# Altium PCB 全志-Linux.PcbDoc
Units mil, origin at the board's own origin, x right, y up, seen from the top; angles counter-clockwise.
Board outline 1968.5 x 1377.95 mil, 4 copper layers (Component Side, GND, POWER, Solder Side), stack 33.234 mil thick; 61 components, 52 nets, 328 pads, 234 vias.
Unrouted connection lines stored in the file: 41.
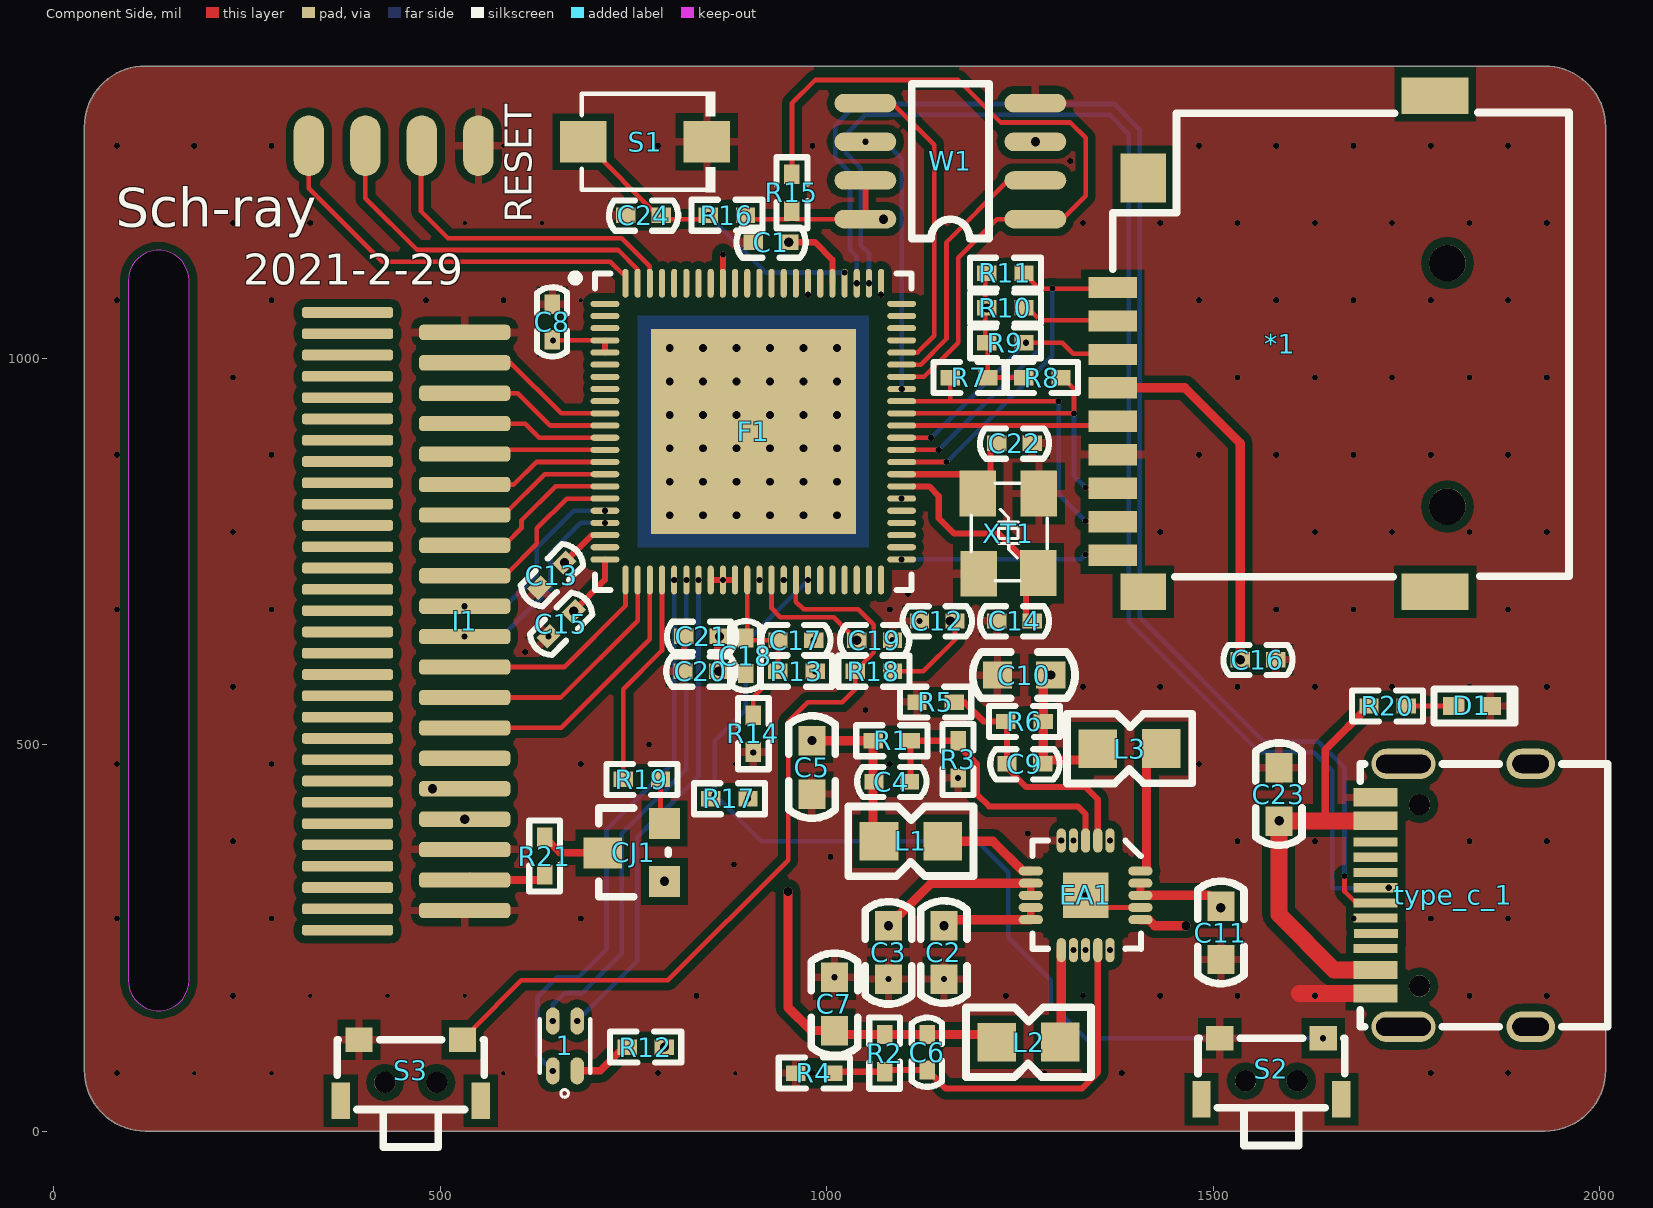
[diagram p0: Component Side view]
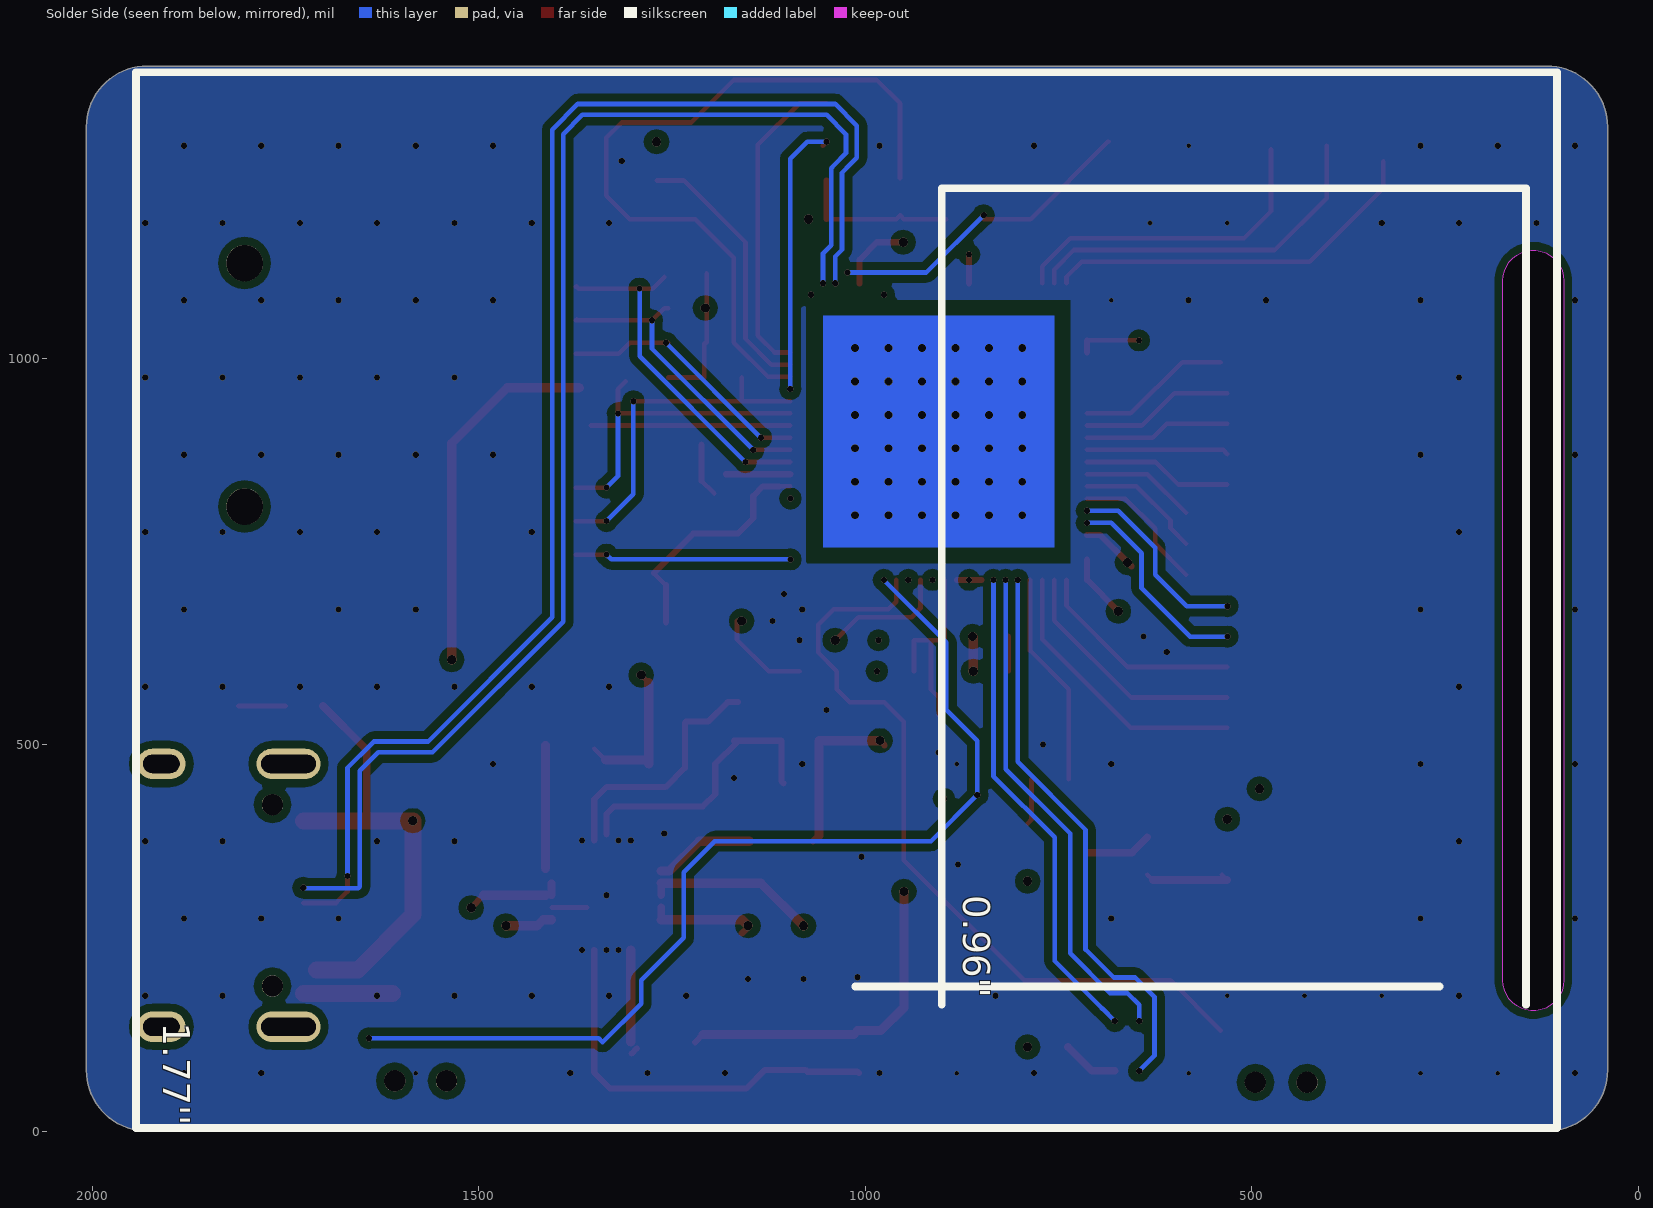
[diagram p1: Solder Side view, seen from below]
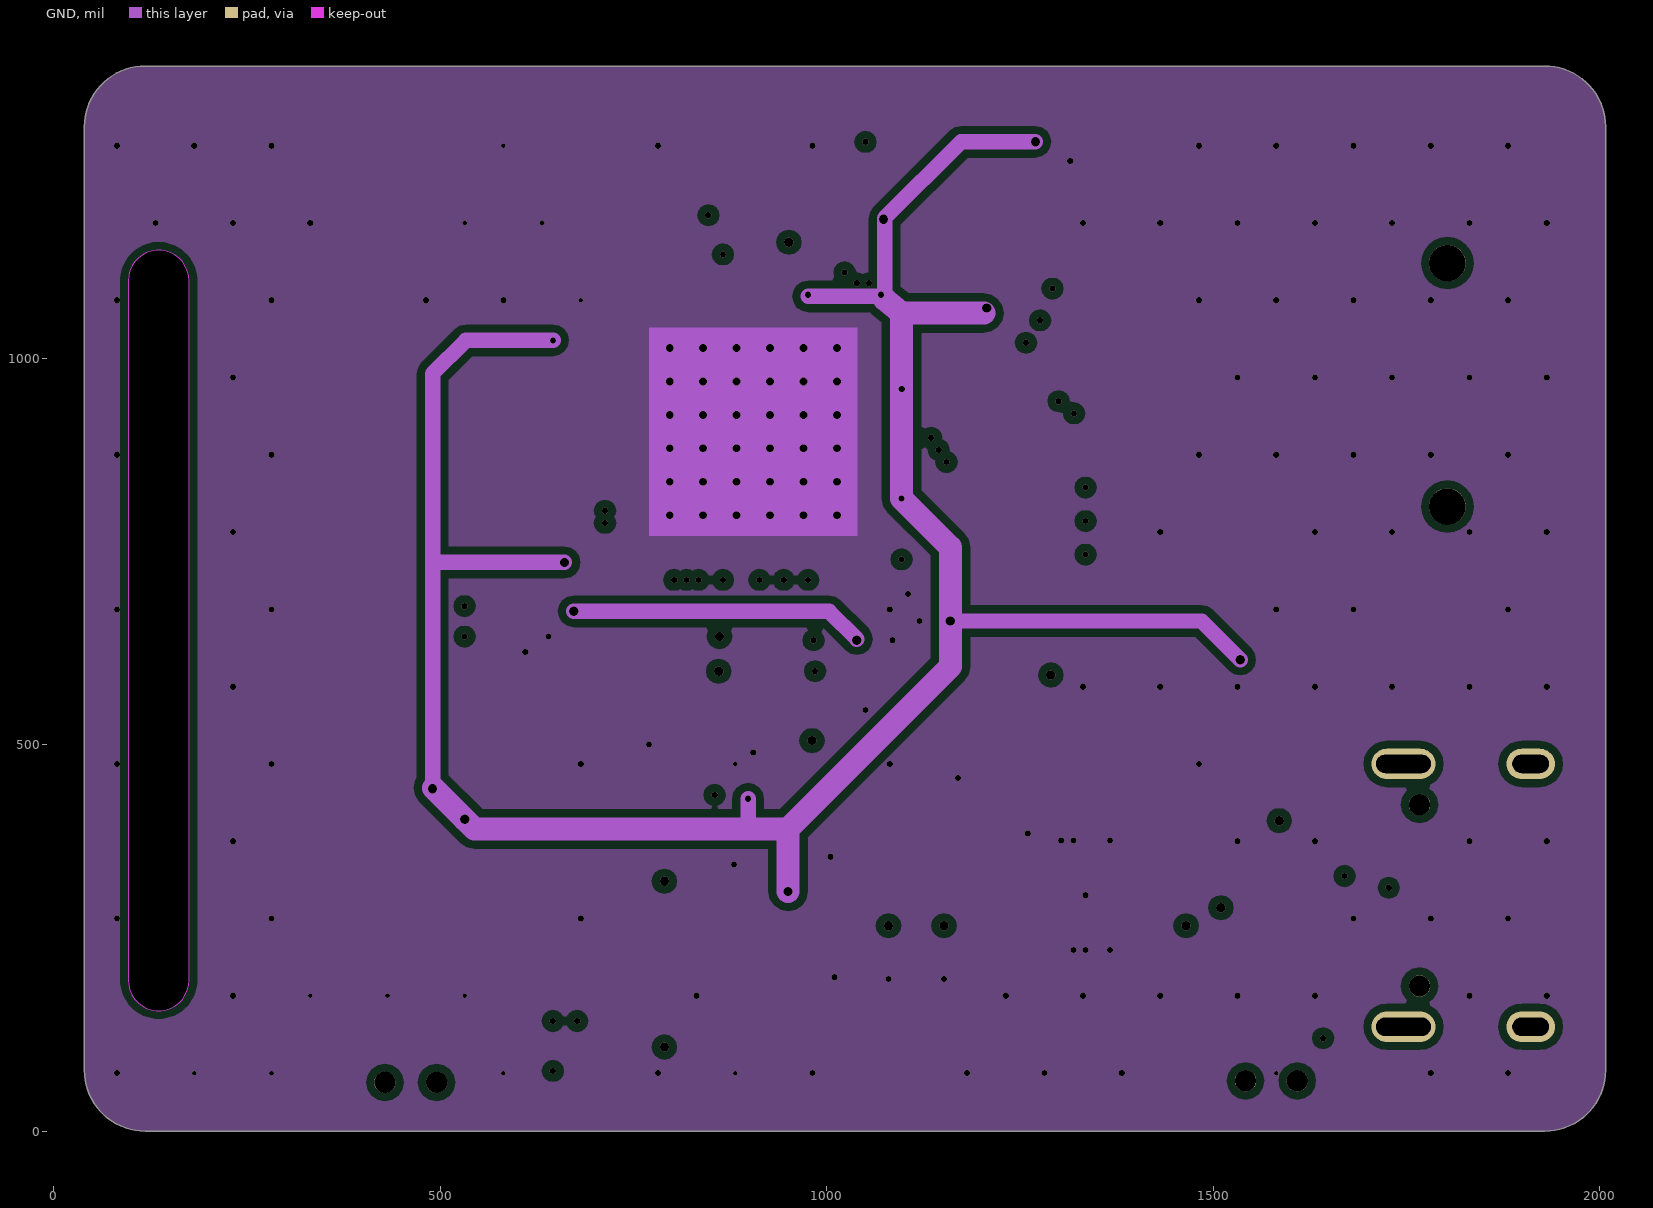
[diagram p2: GND]
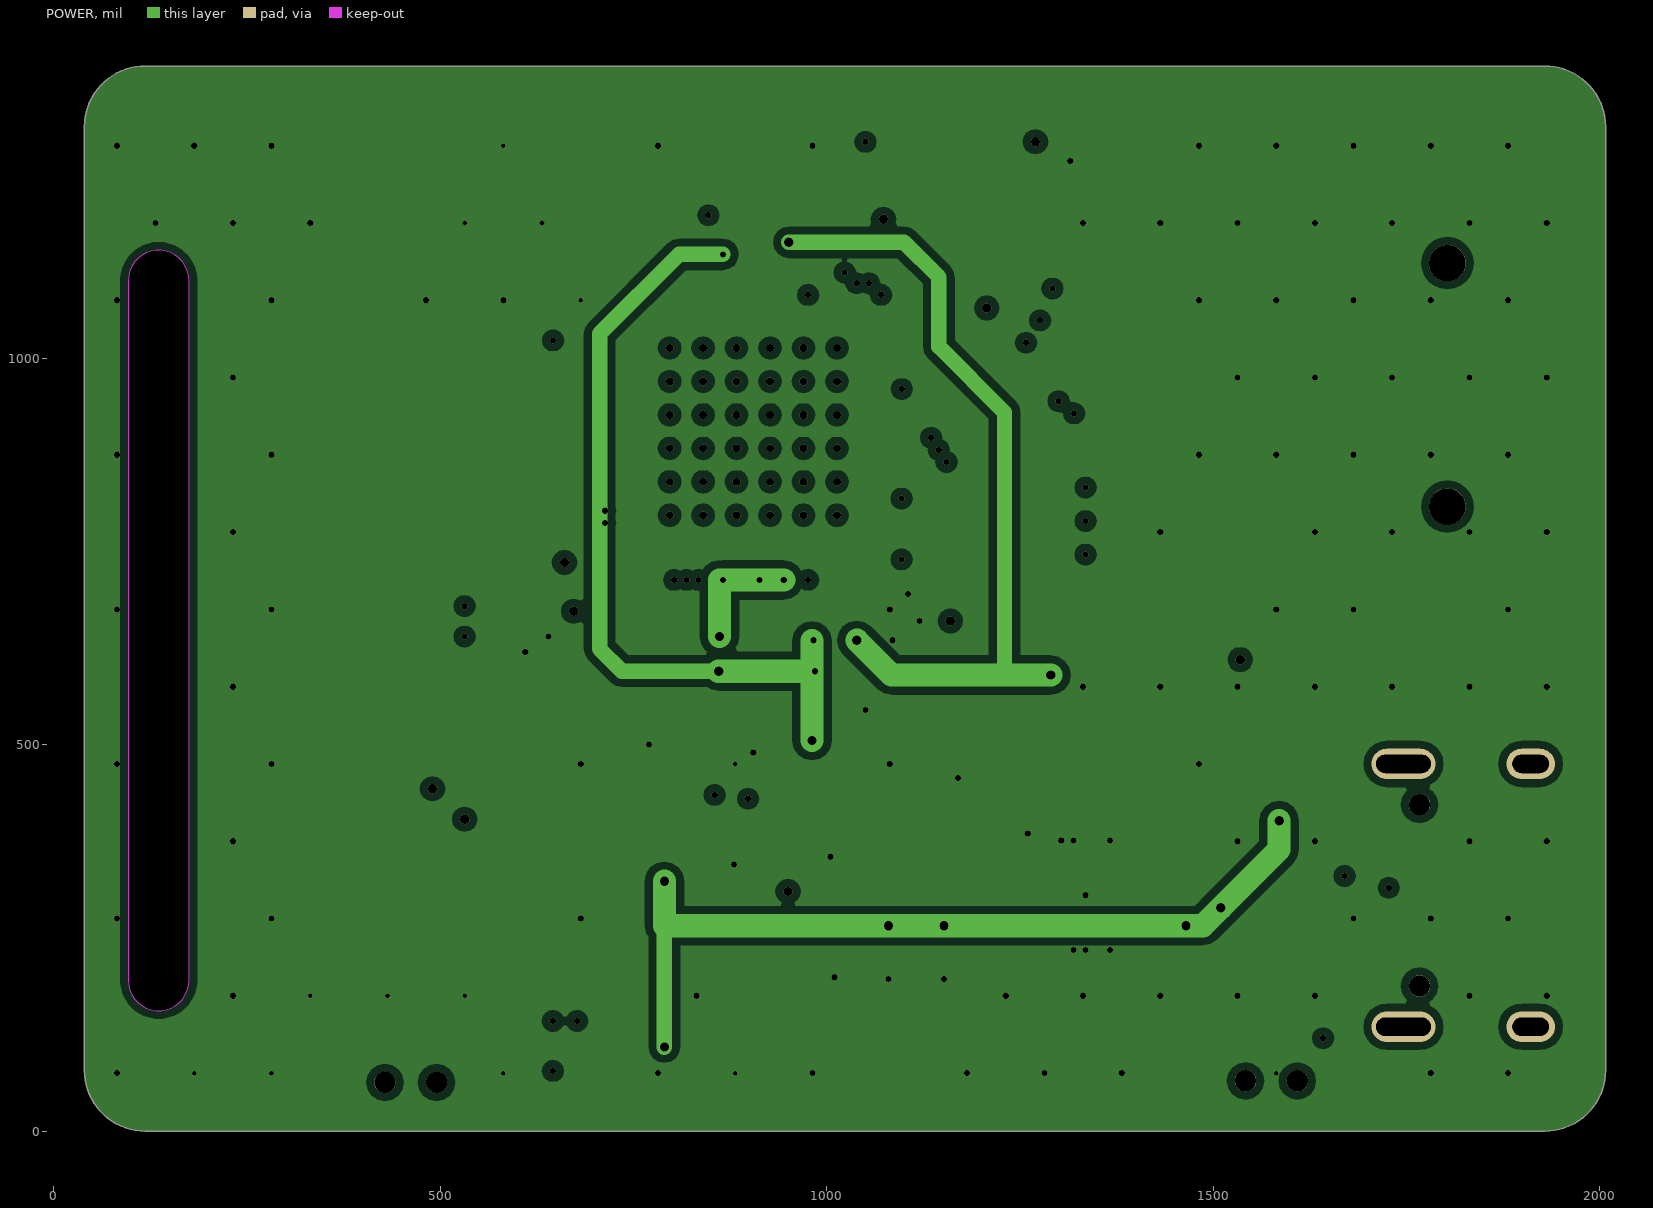
[diagram p3: POWER]
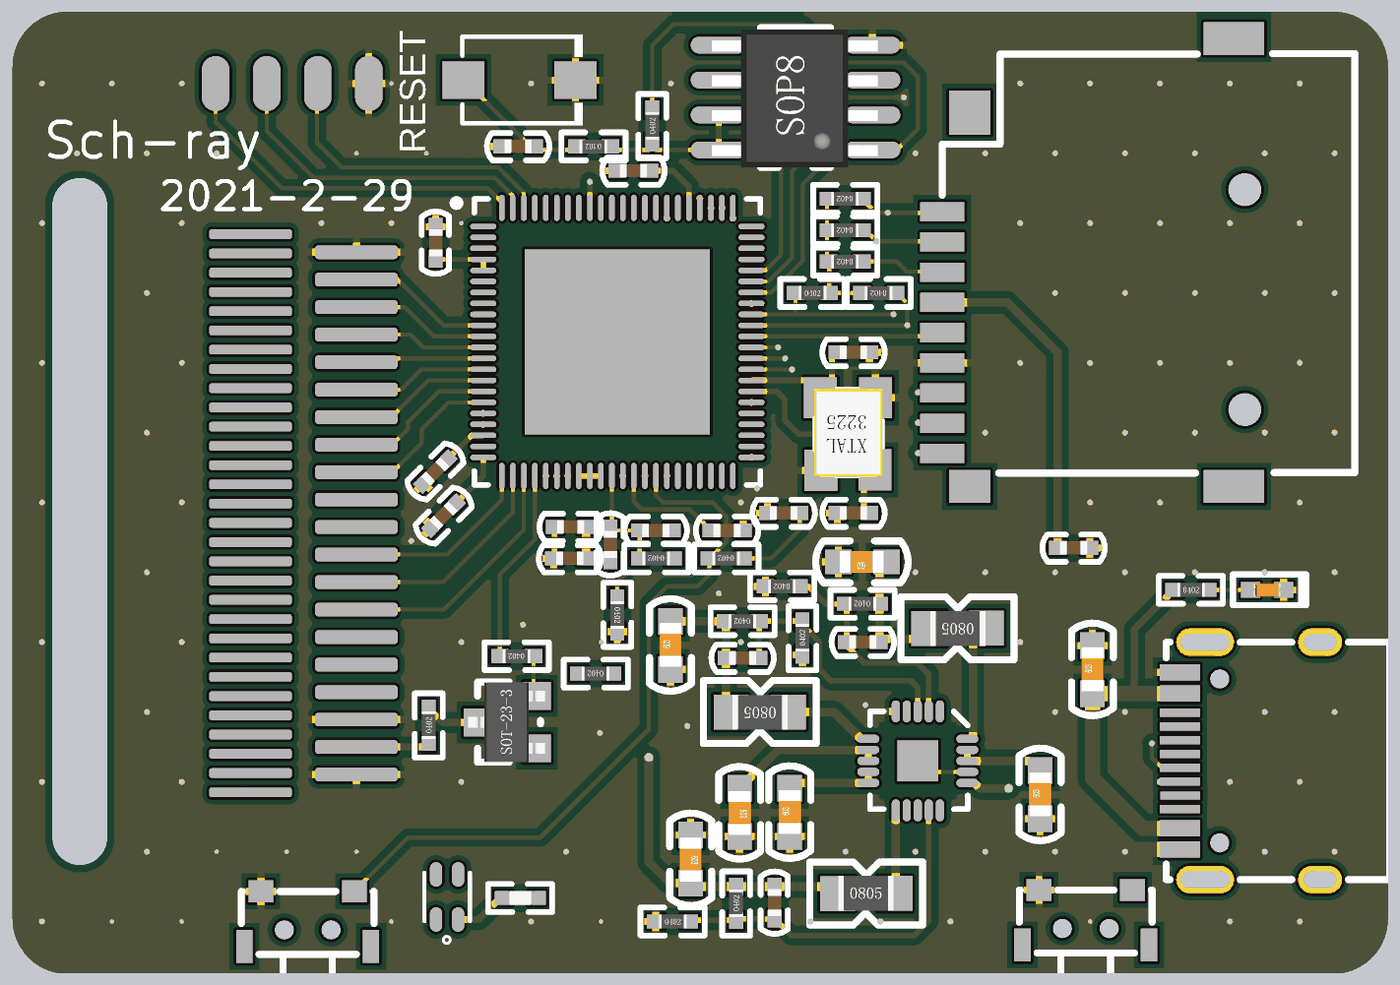
[diagram p4: 3D render of the assembled board from above, using the file's embedded part models]

## Layer stack, top to bottom
Top Solder: solder mask 0.4, Solder Resist, Dk 3.5
Component Side: signal copper 1.4
Dielectric 1: core 12.6, FR-4, Dk 4.8
GND: signal copper 1.417
Dielectric 3: prepreg 5, Dk 4.2
POWER: signal copper 1.417
Dielectric 4: core 10, Dk 4.2
Solder Side: signal copper 1.4
Bottom Solder: solder mask 0.4, Solder Resist, Dk 3.5

## Board outline
39.37,78.74 ccw(c118.11,78.74) 118.11,0 1929.13,0 ccw(c1929.13,78.74) 2007.87,78.74 2007.87,1299.21 ccw(c1929.13,1299.21) 1929.13,1377.95 118.11,1377.95 ccw(c118.11,1299.21) 39.37,1299.21
cut-out: 96.26,195 ccw(c135.63,195) 175,195 175,1100.51 ccw(c135.63,1100.51) 96.26,1100.51

## Design rules (kind name [scope] priority, off if disabled: settings)
Clearance [All] p1: gap=10 ignorepadtopadclearanceinfootprint=FALSE except(0: Arc-Hole Track-Hole SMDPad-Hole THPad-Hole Via-Hole Fill-Hole Poly-Hole Region-Hole Text-Hole)
DiffPairsRouting DiffPair_6milDiffPairsRouting [InDifferentialPair ('差分_1')] p1: maxlimit=16 minlimit=8 mostfreqgap=8 toplayer_minwidth=6 toplayer_maxwidth=6 toplayer_prefwidth=6 midlayer1_minwidth=6 midlayer1_maxwidth=6 midlayer1_prefwidth=6 midlayer2_minwidth=6 midlayer2_maxwidth=6 midlayer2_prefwidth=6 bottomlayer_minwidth=6 bottomlayer_maxwidth=6 bottomlayer_prefwidth=6 maxuncoupledlength=142187.2552mi
DiffPairsRouting DiffPairsRouting_1 [InDifferentialPairClass('usb-2.0')] p2: maxlimit=10 minlimit=10 mostfreqgap=10 toplayer_minwidth=15 toplayer_maxwidth=15 toplayer_prefwidth=15 midlayer1_minwidth=15 midlayer1_maxwidth=15 midlayer1_prefwidth=15 midlayer2_minwidth=15 midlayer2_maxwidth=15 midlayer2_prefwidth=15 bottomlayer_minwidth=15 bottomlayer_maxwidth=15 bottomlayer_prefwidth=15 maxuncoupledlength=500
DiffPairsRouting [All] p3: maxlimit=10 minlimit=10 mostfreqgap=10 toplayer_minwidth=15 toplayer_maxwidth=15 toplayer_prefwidth=15 midlayer1_minwidth=15 midlayer1_maxwidth=15 midlayer1_prefwidth=15 midlayer2_minwidth=15 midlayer2_maxwidth=15 midlayer2_prefwidth=15 bottomlayer_minwidth=15 bottomlayer_maxwidth=15 bottomlayer_prefwidth=15 maxuncoupledlength=500
MatchedLengths DiffPair_6milMatchedLengths [InDifferentialPair ('差分_1')] p1: tolerance=5 checknetsindiffpair=TRUE checkdiffpairvsdiffpair=FALSE checkxsignals=FALSE checkothers=FALS
MatchedLengths [InDifferentialPairClass('usb-2.0')] p2: tolerance=1000 checknetsindiffpair=FALSE checkdiffpairvsdiffpair=TRUE checkxsignals=TRUE checkothers=TRUE
PlaneConnect [All] p1: pad.planeconnectstyle=Relief pad.reliefexpansion=20 pad.reliefentries=4 pad.reliefconductorwidth=10 pad.reliefairgap=10 via.planeconnectstyle=Direct via.reliefexpansion=20 via.reliefentries=4 via.reliefconductorwidth=10 via.reliefairgap=10
PolygonConnect PolygonConnect_4 [All vs IsNamedPolygon('GND-4')] p1: thpad.connectstyle=Relief thpad.reliefconductorwidth=10 thpad.reliefentries=4 thpad.polygonreliefangle="90 Angle" thpad.airgapwidth=10 smdpad.connectstyle=Relief smdpad.reliefconductorwidth=10 smdpad.reliefentries=4 smdpad.polygonreliefangle="90 Angle" smdpad.airgapwidth=10 via.connectstyle=Direct via.reliefconductorwidth=10 via.reliefentries=4 via.polygonreliefangle="90 Angle" via.airgapwidth=10
PolygonConnect PolygonConnect_3 [All vs IsNamedPolygon('GND-3')] p2: thpad.connectstyle=Relief thpad.reliefconductorwidth=10 thpad.reliefentries=4 thpad.polygonreliefangle="90 Angle" thpad.airgapwidth=10 smdpad.connectstyle=Relief smdpad.reliefconductorwidth=10 smdpad.reliefentries=4 smdpad.polygonreliefangle="90 Angle" smdpad.airgapwidth=10 via.connectstyle=Direct via.reliefconductorwidth=10 via.reliefentries=4 via.polygonreliefangle="90 Angle" via.airgapwidth=10
PolygonConnect PolygonConnect_2 [All vs IsNamedPolygon('GND-2')] p3: thpad.connectstyle=Relief thpad.reliefconductorwidth=10 thpad.reliefentries=4 thpad.polygonreliefangle="90 Angle" thpad.airgapwidth=10 smdpad.connectstyle=Relief smdpad.reliefconductorwidth=10 smdpad.reliefentries=4 smdpad.polygonreliefangle="90 Angle" smdpad.airgapwidth=10 via.connectstyle=Direct via.reliefconductorwidth=10 via.reliefentries=4 via.polygonreliefangle="90 Angle" via.airgapwidth=10
PolygonConnect PolygonConnect_1 [All vs IsNamedPolygon('GND-1')] p4: thpad.connectstyle=Relief thpad.reliefconductorwidth=10 thpad.reliefentries=4 thpad.polygonreliefangle="90 Angle" thpad.airgapwidth=10 smdpad.connectstyle=Relief smdpad.reliefconductorwidth=10 smdpad.reliefentries=4 smdpad.polygonreliefangle="90 Angle" smdpad.airgapwidth=10 via.connectstyle=Direct via.reliefconductorwidth=10 via.reliefentries=4 via.polygonreliefangle="90 Angle" via.airgapwidth=10
PolygonConnect [All] p5: connectstyle=Relief reliefconductorwidth=10 reliefentries=4 polygonreliefangle="90 Angle" airgapwidth=10
RoutingVias [All] p1: holewidth=28 width=50 viastyle="Through Hole" minholewidth=28 minwidth=50 maxholewidth=28 maxwidth=50
SolderMaskExpansion [All] p1: expansion=4
Width [All] p1: maxlimit=50 minlimit=4 preferedwidth=30 toplayer_maxwidth=10 toplayer_prefwidth=6 midlayer1_minwidth=10 midlayer2_minwidth=10 bottomlayer_maxwidth=10 bottomlayer_prefwidth=6 minimp=50.000000 maximp=50.000000 favimp=50.000000
28 further rules are at their usual default settings.

## Components (designator, comment, footprint, x,y, rotation, side; value= is the part's Value field where it differs from the comment)
1 "1615RGB" 1615RGB 660.81,118.66 r0 top
*1 "tf卡" tf卡座 1625.55,989.17 r90 top locked
C1 "Cap Semi" C0402 950,1150 r180 top value=0.1uF
C2 "Cap Semi" C0603 1151.63,196.63 r90 top value=10uF
C3 "Cap Semi" C0603 1080,265.63 r270 top value=10uF
C4 "Cap Semi" C0402 1106.2,452.2 r180 top value=220pF
C5 "Cap Semi" C0603 981,436 r90 top value=10uF
C6 "Cap Semi" C0402 1130,80 r90 top value=220pF
C7 "Cap Semi" C0603 1010,199 r270 top value=10uF
C8 "Cap Semi" C0402 645,1025 r90 top value=0.1uF
C9 "Cap Semi" C0402 1278.31,475 r180 top value=20pF
C10 "Cap Semi" C0603 1290,590 r180 top value=10uF
C11 "Cap Semi" C0603 1510,222 r90 top value=10uF
C12 "Cap Semi" C0402 1165.05,660 r180 top value=0.1uF
C13 "Cap Semi" C0402 660,735 r225 top value=0.1uF
C14 "Cap Semi" C0402 1265,660 r180 top value=18pF
C15 "Cap Semi" C0402 671.82,671.82 r225 top value=0.1uF
C16 "Cap Semi" C0402 1580,610 r180 top value=0.1uF
C17 "Cap Semi" C0402 938,635 r0 top value=0.1uF
C18 "Cap Semi" C0402 895,593 r90 top value=0.1uF
C19 "Cap Semi" C0402 1040,635 r0 top value=0.1uF
C20 "Cap Semi" C0402 859.13,595 r180 top value=0.1uF
C21 "Cap Semi" C0402 860.13,640 r180 top value=1uF
C22 "Cap Semi" C0402 1265,890 r180 top value=18pF
C23 "Cap Semi" C0603 1585,401 r90 top value=10uF
C24 "Cap Semi" C0402 785,1185 r180 top value=0.1uF
CJ1 "MOSFET-N" SOT23 790.63,318.12 r90 top
D1 "LED3" "LED0402 R" 1834.88,549.99 r0 top
EA1 "EA3036" QFN20-3mm 1366.5,375.87 r270 top
F1 "F1C100S" QFN88 905,905 r0 top
I1 "Header 20" 20P液晶 531.5,285.43 r0 top locked
L1 "Inductor" L0805 1150,375 r180 top value=2.2uH
L2 "Inductor" L0805 1220,115 r0 top value=2.2uH
L3 "Inductor" L0805 1433,495 r180 top value=2.2uH
R1 "Res3" R0402 1108.2,505 r180 top value=150K
R2 "Res3" R0402 1075,76.8 r90 top value=68K
R3 "Res3" R0402 1170,456.8 r90 top value=100K
R4 "Res3" R0402 960,75 r0 top value=15K
R5 "Res3" R0402 1165,555 r180 top value=100K
R6 "Res3" R0402 1280,529.94 r180 top value=100K
R7 "Res3" R0402 1160,975 r0 top value=47K
R8 "Res3" R0402 1303.2,975 r180 top value=47K
R9 "Res3" R0402 1255.2,1020 r180 top value=47K
R10 "Res3" R0402 1255.2,1065 r180 top value=47K
R11 "Res3" R0402 1255.2,1110 r180 top value=47K
R12 "Res3" R0402 741.75,108.66 r0 top value=510R
R13 "Res3" R0402 985,595 r180 top value=2K
R14 "Res3" R0402 905,538.2 r270 top value=2K
R15 "Res3" R0402 955,1190 r90 top value=10K
R16 "Res3" R0402 895,1185 r180 top value=47K
R17 "Res3" R0402 898.2,430 r180 top value=47K
R18 "Res3" R0402 1085,595 r180 top value=47K
R19 "Res3" R0402 785,455 r180 top value=10K
R20 "Res3" R0402 1701.68,549.99 r0 top value=100K
R21 "Res3" R0402 635,331.8 r90 top value=130R
S1 "SW-PB" 3*4*2.0小龟按键 684.65,1279.94 r0 top locked
S2 "SW-PB" 轻触按键2*4*3.5 1642.28,120.13 r180 top
S3 "SW-PB" 轻触按键2*4*3.5 528.7,118.11 r180 top
type_c_1 "type_c_16" type_c_16 1710.2,178.03 r90 top
W1 "W25Qxx" SOP8 1269,1179 r180 top
XT1 "XT3225晶振" XTAL-3225 1235,773 r180 top

## Footprints (in the part's own frame and the unit in brackets; to place one, negate y for a bottom-side part, rotate by r counter-clockwise, add the part's x,y. Pads: shape width x height; smd on the part's side, far side on the other; paste and mask are expansions set on the pad)
3*4*2.0小龟按键 [mm]
  rect 1.53x1.36 smd: 1(0.003,0.001) 2(4.073,0.001)
  silkscreen extent -0.04,-1.65 4.34,1.65
20P液晶 [mm]
  rrect50% 3x0.5 smd: 1(0,0) 2(0,1) 3(0,2) 4(0,3) 5(0,4) 6(0,5) 7(0,6) 8(0,7) 9(0,8) 10(0,9) 11(0,10) 12(0,11) 13(0,12) 14(0,13) 15(0,14) 16(0,15) 17(0,16) 18(0,17) 19(0,18) 20(0,19)
1615RGB [mil]
  oval 17.64x35 smd: 1(16.28,-40.76) 2(16.28,23.76) 3(-15.22,23.76) 4(-15.22,-40.76)
  silkscreen extent -32,-75 33,26
C0402 [mil]
  rect 25x20 smd: 1(-1,0) 2(45,0)
  silkscreen extent -23,-19 67,20, body extent 2,-10 42,10, height 20
C0603 [mil]
  rect 38x35 smd: 1(0,0) 2(69,0)
  silkscreen extent -31,-30 101,30, body extent 4,-16 67,16, height 12
L0805 [mil] "1/8W"
  rect 50x50 smd: 1(0,0) 2(82.3,0.2)
  silkscreen extent -40,-45 122,45, body extent 1,-24 80,25, height 22
"LED0402 R" [mm]
  rect 0.7x0.58 smd: 1(-0.6,0) 2(0.6,0)
  silkscreen extent -1.24,-0.56 1.42,0.56, body extent -0.5,-0.25 0.51,0.25, height 0.45
QFN20-3mm [mm]
  oval 0.8x0.3 smd: 1(0,0) 2(0,-0.4) 3(0,-0.8) 4(0,-1.2) 5(0,-1.6) 11(3.6,-1.6) 12(3.6,-1.2) 13(3.6,-0.8) 14(3.6,-0.4) 15(3.6,0)
  oval 0.3x0.8 smd: 6(1,-2.6) 7(1.4,-2.6) 8(1.8,-2.6) 9(2.2,-2.6) 10(2.6,-2.6) 16(2.6,1) 17(2.2,1) 18(1.8,1) 19(1.4,1) 20(1,1)
  rect 1.5x1.5 smd: 26(1.8,-0.8)
  silkscreen extent 0,-2.54 3.56,1.02
QFN88 [mm] "QFN, 88-Leads, Body 10.00x10.00mm, Pitch 0.40mm, Thermal Pad 6.74x6.74mm, IPC Medium Density"
  oval 0.95x0.2 smd: 1(-4.875,4.2) 2(-4.875,3.8) 3(-4.875,3.4) 4(-4.875,3) 5(-4.875,2.6) 6(-4.875,2.2) 7(-4.875,1.8) 8(-4.875,1.4) 9(-4.875,1) 10(-4.875,0.6) 11(-4.875,0.2) 12(-4.875,-0.2) 13(-4.875,-0.6) 14(-4.875,-1) 15(-4.875,-1.4) 16(-4.875,-1.8) 17(-4.875,-2.2) 18(-4.875,-2.6) 19(-4.875,-3) 20(-4.875,-3.4) 21(-4.875,-3.8) 22(-4.875,-4.2) 45(4.875,-4.2) 46(4.875,-3.8) 47(4.875,-3.4) 48(4.875,-3) 49(4.875,-2.6) 50(4.875,-2.2) 51(4.875,-1.8) 52(4.875,-1.4) 53(4.875,-1) 54(4.875,-0.6) 55(4.875,-0.2) 56(4.875,0.2) 57(4.875,0.6) 58(4.875,1) 59(4.875,1.4) 60(4.875,1.8) 61(4.875,2.2) 62(4.875,2.6) 63(4.875,3) 64(4.875,3.4) 65(4.875,3.8) 66(4.875,4.2)
  oval 0.2x0.95 smd: 23(-4.2,-4.875) 24(-3.8,-4.875) 25(-3.4,-4.875) 26(-3,-4.875) 27(-2.6,-4.875) 28(-2.2,-4.875) 29(-1.8,-4.875) 30(-1.4,-4.875) 31(-1,-4.875) 32(-0.6,-4.875) 33(-0.2,-4.875) 34(0.2,-4.875) 35(0.6,-4.875) 36(1,-4.875) 37(1.4,-4.875) 38(1.8,-4.875) 39(2.2,-4.875) 40(2.6,-4.875) 41(3,-4.875) 42(3.4,-4.875) 43(3.8,-4.875) 44(4.2,-4.875) 67(4.2,4.875) 68(3.8,4.875) 69(3.4,4.875) 70(3,4.875) 71(2.6,4.875) 72(2.2,4.875) 73(1.8,4.875) 74(1.4,4.875) 75(1,4.875) 76(0.6,4.875) 77(0.2,4.875) 78(-0.2,4.875) 79(-0.6,4.875) 80(-1,4.875) 81(-1.4,4.875) 82(-1.8,4.875) 83(-2.2,4.875) 84(-2.6,4.875) 85(-3,4.875) 86(-3.4,4.875) 87(-3.8,4.875) 88(-4.2,4.875)
  rect 6.74x6.74 smd: 89(0,0)
  silkscreen extent -5.97,-5.2 5.2,5.2, body extent -5.05,-5.05 5.05,5.05, height 0.85
R0402 [mil] "1/16W"
  rect 25x20 smd: 1(0,0) 2(48.2,0)
  silkscreen extent -22,-20 70,20, body extent 5,-10 44,10, height 14
SOP8 [mil]
  oval 80x24 smd: 1(-1,-1) 2(-1,-51) 3(-1,-101) 4(-1,-151) 5(219,-151) 6(219,-101) 7(219,-51) 8(219,-1)
  silkscreen extent 59,-176 159,24, body extent -9,-174 229,24, height 63
SOT23 [mil]
  rect 40x40 smd: 1(4.88,0.63) 2(79.88,0.63)
  rect 40x50 smd: 3(41.88,80.63)
  silkscreen extent -15,-4 100,86, body extent -15,-11 99,99, height 47
tf卡座 [mm]
  rect 0.7x1.6 smd: 1(2.6,6.491) 2(1.5,6.491) 3(0.4,6.491) 4(-0.7,6.491) 5(-1.8,6.491) 6(-2.9,6.491) 7(-4,6.491) 8(-5.1,6.491) 9(-6.2,6.491)
  rect 1.2x1.5 smd: 10(-7.4,5.491)
  rect 1.2x2.2 smd: 11(-7.4,-4.109) 12(8.9,-4.109)
  rect 1.6x1.5 smd: 13(6.2,5.491)
  round 1.2 hole 1.2 unplated: ""(-4.6,-4.509) ""(3.4,-4.509)
  silkscreen extent -6.91,-8.51 8.35,6.49, body extent -7.72,-10.81 8.38,6.49, height 1.85
type_c_16 [mm]
  rect 0.6x1.45 smd: 1(0,0) 2(0.775,0) 11(5.675,0) 12(6.445,0)
  rect 0.3x1.45 smd: 3(1.475,0) 4(1.965,-0.015) 5(2.475,0) 6(2.975,0) 7(3.475,0) 8(3.975,0) 9(4.475,0) 10(4.975,0)
  oval 1x2.1 hole 0.6 slot 1.8 at 90 deg: 13(-1.095,-0.915) 14(7.545,-0.915)
  oval 1x1.6 hole 0.6 slot 1.2 at 90 deg: 15(-1.095,-5.095) 16(7.545,-5.095)
  round 0.7 hole 0.7 unplated: ""(0.245,-1.445) ""(6.205,-1.445)
  silkscreen extent -1.09,-7.63 7.54,0.5
XTAL-3225 [mil]
  rect 47.24x59.06 smd: 1(-38.5,51) 2(-39.5,-52) 3(39.5,-52) 4(38.5,52)
  silkscreen extent -50,-65 48,61, body extent -50,-65 48,61, height 31
轻触按键2*4*3.5 [mm]
  rect 0.9x0.8 smd: 1(0,0) 2(3.4,0)
  rect 0.6x1.2 smd: GND(-0.6,2) GND(4,2)
  round 0.7 hole 0.7 unplated: ""(0.85,1.4) ""(2.55,1.4)
  silkscreen extent -0.71,0 4.11,3.53

## Part data
C1 C2 C3 C4 C5 C6 C7 C8 C9 C10 C11 C12 C13 C14 C15 C16 C17 C18 C19 C20 C21 C22 C23 C24: "Capacitor (Semiconductor SIM Model)", LatestRevisionDate=29-May-2009, LatestRevisionNote="IPC-7351 Footprint Added.", PackageDescription="Chip Capacitor", PackageReference=C1206, Published=8-Jun-2000, Publisher="Altium Limited"
CJ1: "N-Channel MOSFET", LatestRevisionDate=17-Jul-2002, LatestRevisionNote="Re-released for DXP Platform.", PackageDescription="TO, Flat Index; 3 In-Line, Axial Leads; Body Dia. 4.6mm; Lead Dia. 0.5 mm (max)", PackageReference=E3, PackageVersion=1995/1996, Published=8-Jun-2000, Publisher="Altium Limited"
D1: "Typical BLUE SiC LED", DatasheetVersion=16-Apr-2002, LatestRevisionDate=17-Dec-2003, LatestRevisionNote="PCB Footprint replaced.", PackageDescription="SM LED; 2 C-Bend Leads; Body 3.5 x 2.8 x 1.9 mm, inc leads (LxWxH typ)", PackageReference=3.5X2.8X1.9, PackageVersion=16-Apr-2002, Published=8-Jun-2000, Publisher="Altium Limited"
I1: "Header, 20-Pin", LatestRevisionDate=17-Jul-2002, LatestRevisionNote="Re-released for DXP Platform.", Publisher="Altium Limited"
R1 R2 R3 R4 R5 R6 R7 R8 R9 R10 R11 R12 R13 R14 R15 R16 R17 R18 R19 R20 R21: "Resistor", LatestRevisionDate=29-May-2009, LatestRevisionNote="IPC-7351 Footprint Added.", PackageDescription="Chip Resistor", PackageReference=J1-0603, Published=8-Jun-2000, Publisher="Altium Limited"
S1 S2 S3: "Switch", LatestRevisionDate=17-Jul-2002, LatestRevisionNote="Re-released for DXP Platform.", PackageDescription="Switch; 2 Leads", PackageReference=SPST-2, Published=24-Mar-1999, Publisher="Altium Limited"
W1: "外置Flash", BOM名称=ÍâÖ, 学习资源=www.oooc
L1 L2 L3: Code_IEC=1005, Code_JEITA=0402, LatestRevisionDate=29-May-2009, LatestRevisionNote="IPC-7351 Footprint Added.", PackageDescription="Chip Inductor", PackageReference=0402-A, Published=8-Jun-2000, Publisher="Altium Limited"

## Free pads (board coordinates)
  rrect50% 118.11x13.78 smd: 23(380,260) 24(380,287.56) 25(380,315.12) 26(380,342.68) 27(380,370.24) 28(380,397.8) 29(380,425.35) 30(380,452.91) 31(380,480.47) 32(380,508.03) 33(380,535.59) 34(380,563.15) 35(380,590.71) 36(380,618.27) 37(380,645.83) 38(380,673.39) 39(380,700.94) 40(380,728.5) 41(380,756.06) 42(380,783.62) 43(380,811.18) 44(380,838.74) 45(380,866.3) 46(380,893.86) 47(380,921.42) 48(380,948.98) 49(380,976.54) 50(380,1004.09) 51(380,1031.65) 52(380,1059.21)
  oval 39.37x78.74 smd: 53(330,1275) 54(403.11,1275) 55(476.22,1275) 56(549.33,1275)

## Via types
v1: diameter 8, hole 8, Component Side to Solder Side, tented both sides, 162 vias
v2: diameter 10, hole 10, Component Side to Solder Side, tented both sides, 36 vias
v3: diameter 12, hole 12, Component Side to Solder Side, tented both sides, 23 vias
v4: diameter 6, hole 6, Component Side to Solder Side, tented both sides, 13 vias

## Nets (pads, with @x,y where several pads share a name; then routed paths per layer and width w, separated by ;. In a path a pad name is that pad's centre, name@x,y a point inside that pad or via, vN(x,y) a via of type N, cw(c..) or ccw(c..) an arc to the next point about the centre after c; other vN are vias at no path point)
1V1: C1.1 C9.1 C10.1 C15.1 C19.1 F1.22 F1.35 F1.71 L3.2 R6.1 | length 1955
  Component Side w6: F1.35 928.62,676.38 940,665 1009,665 v3(1039,635) ; C9.1 C9.1@1280,475 ; C10.1@1280,580 v3(1290,590) ; L3.2@1335.9,480 L3.2
  Component Side w8: v3(672.53,672.53) 713.07,713.07 F1.22 ; v3(951,1150) 985,1150 1007.36,1127.64 F1.71
  Component Side w12: C9.1@1280,475 C9.1@1280,480 ; C10.1@1280,580 R6.1 C9.1@1280,480 ; L3.2@1335.9,480 C9.1@1280,480
  GND w20: v3(672.53,672.53) 1003.03,672.53 v3@1039,636.55
  POWER w20: v3(951,1150) 1100,1150 1145,1105 1145,1015 1230,930 1230,590
  POWER w30: v3(1039,635) 1084,590 1230,590 v3(1290,590)
2V5: C4.2 C5.2 C17.2 C20.1 C21.1 F1.30 F1.31 F1.32 F1.34 F1.36 F1.80 L1.2 R1.2 R13.1 | length 1512.7
  Component Side w6: C21.1@860.13,639 v3(861.13,640)
  Component Side w8: F1.30 v1(865.63,713.07) F1.32 ; F1.80 v1(865.63,1134.37) ; C5.2@975,499 C5.2 ; L1.2@1060,382.5 L1.2
  Component Side w12: v3(860.13,595) C21.1@860.13,639 ; C5.2 R1.2 L1.2@1060,382.5
  POWER w20: v3(860.13,595) 735,595 706.18,623.82 706.18,1031.65 808.9,1134.37 v1(865.63,1134.37)
  POWER w30: v3(860.13,595) 980.95,595 ; v3(861.13,640) 861.13,713 ; v1(865.63,713.07) v1(912.87,713.07) v1(944.37,713.07) ; v3(980.95,505.2) 980.95,595 ; v1@980.95,634.37 980.95,595
  other v1: 985,595 983,635
3V3: *1.4 C6.2 C7.2 C8.1 C12.1 C13.1 C16.2 F1.4 F1.5 F1.20 F1.50 F1.67 F1.73 I1.4 I1.5 L2.1 R2.2 R7.2 R8.2 R9.2 R10.2 R11.2 R15.1 R16.1 R17.1 R18.1 W1.3 W1.7 W1.8 | length 4814.1
  Component Side w6: C8.1 v1(645.89,1023.11) F1.4 ; R16.1@895,1180 950,1180 955,1185 960,1180 W1.8 ; R18.1 1125,595 1166.05,636.05 C12.1 ; R9.2@1205,1020 R11.2@1205,1110 ; R9.2 1208.2,1018.8 R7.2 R8.2
  Component Side w8: C13.1@655.71,730.71 v3(660.71,735.71) 696.14,771.14 F1.20 ; F1.5 F1.4 ; C7.2 C7.2@1015,125 ; W1.8 W1.7 ; L2.1@1210,125 L2.1
  Component Side w12: v3(950,310) 950,160 980,130 C7.2 ; C7.2@1015,125 R2.2 C6.2 L2.1@1210,125 ; *1.4 1463.39,961.61 1535,890 v3(1535,610)
  GND w20: v3(490,442.91) 490,980 533.11,1023.11 v1(645.89,1023.11) ; 490.71,735.71 v3(660.71,735.71) ; 898.2,392.71 v1(898.2,430) ; v1@975.87,1080 v1@1070.35,1080 ; 1075,1076.23 1075,1181.29 1173.71,1280 v3(1270,1280) ; v3(1160,660) 1485,660 v3(1535,610)
  GND w30: v3@491.06,443.98 v3(531.5,403.54) 544.13,390.91 900,390.91 ; 898.2,392.71 900,390.91 ; v3(950,310) 950,390.91 ; 1075,1076.23 1096.93,1058.42 ; 1203.42,1058.42 1096.93,1058.42 ; 900,390.91 950,390.91 ; 950,390.91 1160,600.91 v3(1160,660) 1160,755.31 v1(1096.93,818.39) 1096.93,1058.42
  other v1: 975.87,1082 1070.35,1082
  other v3: 1207,1065 1073.35,1179.65
5V: C2.2 C3.1 C11.2 C23.1 CJ1.1 EA1.7 EA1.8 EA1.9 EA1.10 EA1.16 EA1.18 EA1.19 R12.2 R20.1 type_c_1.2 type_c_1.11 | length 2227.1
  Component Side w8: v3(1151.63,265.63) 1151.63,264 C2.2@1160,255.63 ; C11.2@1494,305 v3(1510,289) ; C23.1 C23.1@1585.45,401.45
  Component Side w10: EA1.10 EA1.9 ; EA1.8 EA1.7 ; EA1.18 EA1.19 ; 1645,401.45 1645,493.32 R20.1
  Component Side w12: v3(1080,265.63) 1135.12,320.75 EA1.7 ; v3(1151.63,265.63) 1159.5,273.5 EA1.10 ; EA1.16 1416.5,273.5 1424.37,265.63 v3(1465,265.63) ; EA1.18@1413.74,305 C11.2@1494,305
  Component Side w22: C23.1 1585,280 1656.46,208.54 type_c_1.2 ; C23.1@1585.45,401.45 1645,401.45 type_c_1.11 type_c_1.11@1727.2,401.45
  POWER w20: v3(789.95,108.66) 789.95,265.68
  POWER w30: v3(789.95,323.2) 789.95,265.68 790,265.63 v3(1080,265.63) v3(1151.63,265.63) v3(1465,265.63) 1486.63,265.63 v3(1510,289) 1585.4,364.4 v3(1585.4,401.66)
GND: *1.6 C1.2 C2.1 C3.2 C5.1 C7.1 C8.2 C10.2 C11.1 C12.2 C13.2 C14.2 C15.2 C16.1 C18.1 C19.2 C20.2 C21.2 C22.1 C23.2 C24.2 D1.2 EA1.1 EA1.4 EA1.5 EA1.12 EA1.13 EA1.15 EA1.17 I1.1 I1.3 I1.20 pad.56 R3.1 R4.1 R5.2 R14.2 S1.2 S2.2 S3.2 type_c_1.1 type_c_1.12 W1.4 XT1.2 XT1.4 | length 206.7
  Component Side w6: C20.2 C20.2@815.13,596 ; 1360,289.25 EA1.17
  Component Side w8: C20.2@815.13,596 C21.2
  Component Side w22: 1611.77,178.23 type_c_1.1@1727.2,178.23
  other v1: 81.61,75 781.61,75 981.61,75 1181.61,75 1281.61,75 1381.61,75 1781.61,75 1881.61,75 231.61,175 831.61,175 1231.61,175 1331.61,175 1431.61,175 1531.61,175 1631.61,175 1831.61,175 1931.61,175 1080,196.63 1151.63,196.63 1010,199 1319.25,234.13 1335,234.13 1366.5,234.13 81.61,275 281.61,275 681.61,275 1681.61,275 1781.61,275 1881.61,275 1335,305 880,345 1005,355 231.61,375 1531.61,375 1631.61,375 1831.61,375 1931.61,375 1303.5,375.87 1319.25,375.87 1366.5,375.87 1260,385 1170,456.8 81.61,475 281.61,475 681.61,475 1081.61,475 1481.61,475 905,490 770,500 1050,545 231.61,575 1331.61,575 1431.61,575 1531.61,575 1631.61,575 1731.61,575 1831.61,575 1931.61,575 610,620 1085,635 640,640 1120.05,660 81.61,675 281.61,675 1081.61,675 1581.61,675 1681.61,675 1881.61,675 1105,695 231.61,775 1431.61,775 1631.61,775 1731.61,775 1831.61,775 1931.61,775 81.61,875 281.61,875 1481.61,875 1581.61,875 1681.61,875 1781.61,875 1881.61,875 231.61,975 1531.61,975 1631.61,975 1731.61,975 1831.61,975 1931.61,975 81.61,1075 281.61,1075 481.61,1075 581.61,1075 1481.61,1075 1581.61,1075 1681.61,1075 1781.61,1075 1881.61,1075 131.61,1175 231.61,1175 331.61,1175 1331.61,1175 1431.61,1175 1531.61,1175 1631.61,1175 1731.61,1175 1831.61,1175 1931.61,1175 1315,1255 81.61,1275 181.61,1275 281.61,1275 781.61,1275 981.61,1275 1481.61,1275 1581.61,1275 1681.61,1275 1781.61,1275 1881.61,1275
  other v4: 181.61,75 281.61,75 581.61,75 881.61,75 1581.61,75 331.61,175 431.61,175 531.61,175 881.61,475 681.61,1075 531.61,1175 631.61,1175 581.61,1275
HOSCI: C14.1 F1.51 XT1.1 | length 310.2
  Component Side w6: F1.51 F1.51@1110.87,834.13 ; XT1.1@1258,706.5 XT1.1
  Component Side w8: F1.51@1110.87,834.13 1132.48,834.13 1145,821.61 1145,793 1165,773 1222.5,773 XT1.1 ; C14.1@1258,658 XT1.1@1258,706.5
HOSCO: C22.2 F1.52 XT1.3 | length 152.9
  Component Side w6: XT1.3 XT1.3@1212,841.5
  Component Side w8: F1.52 XT1.3@1180,849.88 ; XT1.3@1212,841.5 C22.2@1212,888
KEY1: F1.37 R18.2 S3.1 | length 1019.3
  Component Side w6: S3.1@540,130 605,195 794.55,195 950,350.45 950,529.38 975.62,555 1020,555 1036.8,571.8 R18.2 1061,619.2 1061,655 1041,675 970,675 960.12,684.88 F1.37
KEY2: F1.38 R17.2 S2.1 | length 1317.5
  Solder Side w6: v1(975.87,713.07) 895,632.2 895,545 855,505 v1(855,435) 915,375 1195,375 1235,335 1235,250 1290,195 1290,165 1340,115 1345.13,120.13 v1(1642.28,120.13)
LCD_CS: F1.25 I1.7 | length 364
  Component Side w6: I1.7 656.65,521.65 771.14,636.14 F1.25
LCD_DB0: F1.10 I1.19 | length 200.6
  Component Side w6: I1.19@540,995 590,995 656.38,928.62 F1.10
LCD_DB1: F1.11 I1.18 | length 198.9
  Component Side w6: I1.18 600.28,954.72 642.13,912.87 F1.11
LCD_DB2: F1.12 I1.17 | length 189.1
  Component Side w6: I1.17 609.65,915.35 627.87,897.13 F1.12
LCD_DB3: F1.13 I1.16 | length 183.8
  Component Side w6: I1.16 536.89,881.38 F1.13
LCD_DB4: F1.14 I1.15 | length 193.6
  Component Side w6: I1.15 595,836.61 624.02,865.63 F1.14
LCD_DB5: F1.15 I1.14 | length 148.7
  Component Side w6: I1.14@585,800 634.88,849.88 F1.15
LCD_DB6: F1.16 I1.13 | length 164.6
  Component Side w6: I1.13@585,760 605,780 605,790 649.13,834.13 F1.16
LCD_DB7: F1.17 I1.12 | length 180.5
  Component Side w6: I1.12@585,720 625,760 625,780 663.39,818.39 F1.17
LCD_PWM: F1.26 R19.2 | length 278.8
  Component Side w6: R19.2 736.8,571.8 786.89,621.89 F1.26
LCD_RD: F1.18 I1.11 | length 253.2
  Solder Side w6: v1(531.5,679.13) 584.13,679.13 625,720 625,755 672.64,802.64 v1(713.07,802.64)
LCD_RESET: F1.24 I1.8 | length 317.7
  Component Side w6: I1.8 656.02,561.02 755.39,660.39 F1.24
LCD_RS: F1.23 I1.9 | length 274.4
  Component Side w6: I1.9 660.39,600.39 739.65,679.65 F1.23
LCD_WR: F1.19 I1.10 | length 268.9
  Solder Side w6: v1(531.5,639.76) 579.76,639.76 642.5,702.5 642.5,747.5 681.89,786.89 v1(713.07,786.89)
Net1_1: 1.1 R12.1 | length 73.3
  Component Side w10: 1.1 706.85,77.89 R12.1@737.61,108.66
Net1_2: 1.2 F1.29 | length 635.9
  Solder Side w6: v1(677.09,142.42) 693.32,158.66 693.66,158.66 755,220 755,380 834.13,459.13 v1(834.13,713.07)
Net1_3: 1.3 F1.28 | length 655.6
  Solder Side w6: v1(645.59,142.42) 645.59,163.44 660.81,178.66 683.66,178.66 735,230 735,385 818.39,468.39 v1(818.39,713.07)
Net1_4: 1.4 F1.27 | length 732.9
  Solder Side w6: v1(645.59,77.89) 625.81,97.67 625.81,173.66 650.81,198.66 678.66,198.66 715,235 715,390 802.64,477.64 v1(802.64,713.07)
NetC4_1: C4.1 EA1.3 R1.1 R3.2 | length 373
  Component Side w8: C4.1@1106,450 1108.2,452.2 R1.1 R3.2 ; R3.2@1167.05,502.05 1194,475.1 1194,436 1210,420 1325,420 1335,410 EA1.3@1335,383.74
NetC6_1: C6.1 EA1.14 R2.1 R4.2 | length 521.1
  Component Side w8: R4.2 1010,76.8 R2.1 1077.2,79 C6.1 1154,55 1330,55 1350.75,75.75 EA1.14
NetC9_2: C9.2 EA1.2 R5.1 R6.2 | length 325.4
  Component Side w8: R5.1 1178.2,555 1203.26,529.94 R6.2 1233.31,528.43 C9.2 1233.31,470 1258.31,445 1335,445 1350.75,429.25 EA1.2
NetCJ1_2: CJ1.2 R19.1 | length 59.1
  Component Side w6: R19.1 785,403 CJ1.2
NetCJ1_3: CJ1.3 R21.2 | length 83.3
  Component Side w10: R21.2 655,360 CJ1.3
NetD1_1: D1.1 R20.2 | length 61.4
  Component Side w6: R20.2 D1.1
NetEA1_6: EA1.6 L1.1 | length 130.1
  Component Side w12: L1.1 1215,375 1253.5,336.5 EA1.6
NetEA1_11: EA1.11 L2.2 | length 128.4
  Component Side w8: L2.2@1295.63,106.87 L2.2@1302.3,100.2
  Component Side w12: L2.2@1303.5,115.2 EA1.11
NetEA1_20: EA1.20 L3.1 | length 160.5
  Component Side w8: L3.1@1413.74,498.74 L3.1@1415,500
  Component Side w12: EA1.20@1413.74,340 L3.1@1413.74,498.74
NetI1_2: I1.2 R21.1 | length 116.3
  Component Side w6: I1.2 I1.2@538.49,331.8 ; R21.1@628,324.8 R21.1
  Component Side w10: I1.2 R21.1@628,324.8
RESET: C24.1 F1.70 R16.2 S1.1 | length 410.4
  Component Side w6: S1.1 686,1280 786,1180 R16.2@846.8,1180
  Solder Side w6: v1(846.8,1185) 920.87,1110.93 v1(1023.11,1110.93)
SPI0_CLK: F1.59 W1.6 | length 361.2
  Component Side w6: v1(1050,1280) W1.6@1055,1275
  Solder Side w6: v1(1050,1280) 1075,1280 1097.05,1257.95 v1(1097.05,960)
SPI0_CS: F1.60 R15.2 W1.1 | length 994.8
  Component Side w6: R15.2@955,1233.2 R15.2 955,1330 985,1360 1170,1360 1225,1305 1315,1305 1335,1285 1335,1210 1305,1180 W1.1 1220,1180 1170,1130 1170,1020 1125.87,975.87 F1.60
SPI0_MISO: F1.61 W1.2 | length 345
  Component Side w6: F1.61 1121.61,991.61 1155,1025 1155,1150 1235,1230 W1.2
SPI0_MOSI: F1.62 W1.5 | length 409.4
  Component Side w6: W1.5 1085,1330 1139,1276 1139,1029 1117.36,1007.36 F1.62
SVREF: C17.1 C18.2 F1.33 R13.2 R14.1 | length 259
  Component Side w6: F1.33 897.13,635 915,635 ; R14.1 905,561.12 915,571.12 915,635 ; R13.2 937,595.2 C17.1 915,635
TF_CD: *1.9 F1.45 | length 240.7
  Solder Side w6: v1(1096.93,739.65) 1328.74,739.65 v1(1335,745.91)
TF_CLK: *1.5 F1.56 | length 258.1
  Component Side w6: F1.56 *1.5@1355,912.87
TF_CMD: *1.3 F1.55 R9.1 | length 339.7
  Component Side w6: F1.55 v1(1135,897.13) ; v1(1257.87,1020) R9.1 1305,1020 1319.25,1005.75 *1.3@1374.45,1005.75
  Solder Side w6: v1(1135,897.13) v1(1257.87,1020)
TF_D0: *1.7 F1.57 R8.1 | length 410.4
  Component Side w6: F1.57 v1(1320,928.62) 1320,960 R8.1@1310,970 ; v1(1335,832.52) *1.7@1374.45,832.52
  Solder Side w6: v1(1320,928.62) 1320,847.52 v1(1335,832.52)
TF_D1: *1.8 F1.58 R7.1 | length 442.6
  Component Side w6: F1.58 v1(1300,944.37) ; 1160,944.62 R7.1 ; v1(1335,789.22) *1.8@1374.45,789.22
  Solder Side w6: v1(1300,944.37) 1300,824.22 v1(1335,789.22)
TF_D2: *1.1 F1.53 R11.1 | length 461.4
  Component Side w6: F1.53 v1(1155,865.63) ; R11.1@1260,1105 1275,1090 v1(1292,1090) 1370.81,1090 1373.81,1093 *1.1@1374.45,1092.36
  Solder Side w6: v1(1155,865.63) 1292,1002.63 v1(1292,1090)
TF_D3: *1.2 F1.54 R10.1 | length 396.8
  Component Side w6: F1.54 v1(1145,881.38) ; R10.1@1255,1064.8 1260.2,1064.8 v1(1276,1049) 1372.51,1049 1373.51,1050 *1.2@1374.45,1049.06
  Solder Side w6: v1(1145,881.38) 1276,1012.38 v1(1276,1049)
USB_DN: F1.68 type_c_1.7 | length 1790.4
  Solder Side w6: v1(1054.61,1096.93) 1054.61,1135.67 1044.1,1146.17 1044.1,1245.9 1040,1250 1025,1265 1025,1290 1050,1315 1366,1315 1391,1290 1391,659 1560,490 1630,490 1654,466 1654,316 1656,314 1726.36,314 v1(1727.2,314.84)
USB_DP: F1.69 type_c_1.6 | length 1834.9
  Component Side w6: v1(1670,330) 1670,310 1684.84,295.15 type_c_1.6@1727.2,295.15
  Solder Side w6: v1(1038.86,1096.93) 1038.86,1131.61 1030.1,1140.37 1030.1,1240.1 1019.2,1251 1011,1259.2 1011,1301 1039,1329 1371.8,1329 1405,1295.8 1405,664.8 1565.8,504 1635.8,504 1639.9,499.9 1670,469.8 v1(1670,330)
pads on no net: *1. *1.10 *1.11 *1.12 *1.13 EA1.26 F1.1 F1.2 F1.3 F1.6 F1.7 F1.8 F1.9 F1.21 F1.39 F1.40 F1.41 F1.42 F1.43 F1.44 F1.46 F1.47 F1.48 F1.49 F1.63 F1.64 F1.65 F1.66 F1.72 F1.74 F1.75 F1.76 F1.77 F1.78 F1.79 F1.81 F1.82 F1.83 F1.84 F1.85 F1.86 F1.87 F1.88 F1.89 I1.6 S2. S2.GND S3. S3.GND type_c_1. type_c_1.3 type_c_1.4 type_c_1.5 type_c_1.8 type_c_1.9 type_c_1.10 type_c_1.13 type_c_1.14 type_c_1.15 type_c_1.16
copper on no net: | length 1443.8
  Component Side w6: 330,1255 330,1220 425,1125 601.93,1125 720,1125 739.65,1105.35 739.65,1096.93 ; 403.11,1275 403.11,1206.89 470,1140 730,1140 755.39,1114.61 755.39,1096.93 ; 475,1270 475,1190 510,1155 735,1155 771.14,1118.86 771.14,1096.93 ; 1335,745.91 1374.45,745.91
  other v2: 796.73,796.73 840.04,796.73 883.35,796.73 926.65,796.73 969.96,796.73 1013.27,796.73 796.73,840.04 840.04,840.04 883.35,840.04 926.65,840.04 969.96,840.04 1013.27,840.04 796.73,883.35 840.04,883.35 883.35,883.35 926.65,883.35 969.96,883.35 1013.27,883.35 796.73,926.65 840.04,926.65 883.35,926.65 926.65,926.65 969.96,926.65 1013.27,926.65 796.73,969.96 840.04,969.96 883.35,969.96 926.65,969.96 969.96,969.96 1013.27,969.96 796.73,1013.27 840.04,1013.27 883.35,1013.27 926.65,1013.27 969.96,1013.27 1013.27,1013.27

## Polygon pours and split planes (outlines as drawn)
GND on GND "GND-2" (solid, pour order 0): 39.37,78.74 ccw(c118.11,78.74) 118.11,0 1929.13,0 ccw(c1929.13,78.74) 2007.87,78.74 2007.87,1299.21 ccw(c1929.13,1299.21) 1929.13,1377.95 118.11,1377.95 ccw(c118.11,1299.21) 39.37,1299.21
GND on POWER "GND-3" (solid, pour order 1): 39.37,78.74 ccw(c118.11,78.74) 118.11,0 1929.13,0 ccw(c1929.13,78.74) 2007.87,78.74 2007.87,1299.21 ccw(c1929.13,1299.21) 1929.13,1377.95 118.11,1377.95 ccw(c118.11,1299.21) 39.37,1299.21
GND on Component Side "GND-1" (solid, pour order 2): 39.37,78.74 ccw(c118.11,78.74) 118.11,0 1929.13,0 ccw(c1929.13,78.74) 2007.87,78.74 2007.87,1299.21 ccw(c1929.13,1299.21) 1929.13,1377.95 118.11,1377.95 ccw(c118.11,1299.21) 39.37,1299.21
GND on Solder Side "GND-4" (solid, pour order 3): 39.37,78.74 ccw(c118.11,78.74) 118.11,0 1929.13,0 ccw(c1929.13,78.74) 2007.87,78.74 2007.87,1299.21 ccw(c1929.13,1299.21) 1929.13,1377.95 118.11,1377.95 ccw(c118.11,1299.21) 39.37,1299.21

## Other copper
Component Side:
  pour cut-out: 1280,360 1390,360 1390,250 1280,250
  pour cut-out: 735,1075 1076.51,1075 1076.51,736.51 1075,735 735,735
GND:
  rectangle net GND: 770,770 1040,1040
Solder Side:
  rectangle net GND: 755,755 1055,1055
  pour cut-out: 735,1075 1076.51,1075 1076.51,736.51 1075,735 735,735

## Silkscreen, mask and mechanical layers (free items; w line width, h text height)
Top Overlay:
  text "RESET" at 630,1175 h60 r90
  text "Sch-ray" at 80,1170 h50
  text "2021-2-29" at 245,1095 h40
Bottom Overlay:
  lines w10: 145,163.39 145,1220 900.91,1220 900.91,163.39 ; 257.01,186.94 1012.92,186.94 ; 105,3.86 105,1370 1943.58,1370 1943.58,3.86 105,3.86
  text "0.96''" at 885,305 h60 r90
  text "1.77''" at 1920,140 h60 r90
Mechanical 1:
  lines w10: 39.37,78.74 ccw(c118.11,78.74) 118.11,0 1929.13,0 ccw(c1929.13,78.74) 2007.87,78.74 2007.87,1299.21 ccw(c1929.13,1299.21) 1929.13,1377.95 118.11,1377.95 ccw(c118.11,1299.21) 39.37,1299.21 39.37,78.74 ; 96.26,195 ccw(c135.63,195) 175,195 175,1100.51 ccw(c135.63,1100.51) 96.26,1100.51 96.26,195